# EAGLE board CT_schematic (EAGLE 7.6.0)

Size 100 x 80 mm. Coordinates in mm from the lower left corner, seen from the top.
Outline: 0,0 100,0 100,80 0,80 0,0
Copper layers (1*16): Top 0.035mm / dielectric 1.5mm / Bottom 0.035mm
Design rules "default": minimum track width 10mil, minimum drill 24mil, track to track 8mil, track to pad 8mil, pad to pad 8mil, via to via 8mil, smd to smd 8mil, copper to edge 40mil, drill to drill 8mil, minimum pad ring 10mil, minimum via ring 8mil, stop-mask expansion 4mil, vias tented up to drill 0mil, thermal gap 10mil

## Footprints (pad centres in the part's own frame; a part is rotated, then mirrored left to right if it is on the bottom)
C0402 = smd 0.5 x 0.5: 1 -0.508,0; 2 0.508,0
C0603 = smd 0.8 x 0.8: 1 -0.762,0; 2 0.762,0
C0805 = smd 1.2 x 1.3: 1 -1.016,0; 2 1.016,0
C1210 = smd 1.2 x 2.5: 1 -1.524,0; 2 1.524,0
EXV-9H = smd 3.505 x 1.676: 1 -2.857,0; 2 2.857,0
L0603 = smd 0.8 x 0.8: 1 -0.762,0; 2 0.762,0
PJ-037B_PACKAGE = drill 3.7 square: 1 12,0 | drill 3.2 square: 2 6,0
R0603 = smd 0.8 x 0.8: 1 -0.762,0; 2 0.762,0
UFBGA176 = smd 0.3 x 0.3: A1 0,0; A2 0.65,0; A3 1.3,0; A4 1.95,0; A5 2.6,0; A6 3.25,0; A7 3.9,0; A8 4.55,0; A9 5.2,0; A10 5.85,0; A11 6.5,0; A12 7.15,0; A13 7.8,0; A14 8.45,0; A15 9.1,0; B1 0,-0.65; B2 0.65,-0.65; B3 1.3,-0.65; B4 1.95,-0.65; B5 2.6,-0.65; B6 3.25,-0.65; B7 3.9,-0.65; B8 4.55,-0.65; B9 5.2,-0.65; B10 5.85,-0.65; B11 6.5,-0.65; B12 7.15,-0.65; B13 7.8,-0.65; B14 8.45,-0.65; B15 9.1,-0.65; C1 0,-1.3; C2 0.65,-1.3; C3 1.3,-1.3; C4 1.95,-1.3; C5 2.6,-1.3; C6 3.25,-1.3; C7 3.9,-1.3; C8 4.55,-1.3; C9 5.2,-1.3; C10 5.85,-1.3; C11 6.5,-1.3; C12 7.15,-1.3; C13 7.8,-1.3; C14 8.45,-1.3; C15 9.1,-1.3; D1 0,-1.95; D2 0.65,-1.95; D3 1.3,-1.95; D4 1.95,-1.95; D5 2.6,-1.95; D6 3.25,-1.95; D7 3.9,-1.95; D8 4.55,-1.95; D9 5.2,-1.95; D10 5.85,-1.95; D11 6.5,-1.95; D12 7.15,-1.95; D13 7.8,-1.95; D14 8.45,-1.95; D15 9.1,-1.95; E1 0,-2.6; E2 0.65,-2.6; E3 1.3,-2.6; E4 1.95,-2.6; E12 7.15,-2.6; E13 7.8,-2.6; E14 8.45,-2.6; E15 9.1,-2.6; F1 0,-3.25; F2 0.65,-3.25; F3 1.3,-3.25; F4 1.95,-3.25; F6 3.25,-3.25; F7 3.9,-3.25; F8 4.55,-3.25; F9 5.2,-3.25; F10 5.85,-3.25; F12 7.15,-3.25; F13 7.8,-3.25; F14 8.45,-3.25; F15 9.1,-3.25; G1 0,-3.9; G2 0.65,-3.9; G3 1.3,-3.9; G4 1.95,-3.9; G6 3.25,-3.9; G7 3.9,-3.9; G8 4.55,-3.9; G9 5.2,-3.9; G10 5.85,-3.9; G12 7.15,-3.9; G13 7.8,-3.9; G14 8.45,-3.9; G15 9.1,-3.9; H1 0,-4.55; H2 0.65,-4.55; H3 1.3,-4.55; H4 1.95,-4.55; H6 3.25,-4.55; H7 3.9,-4.55; H8 4.55,-4.55; H9 5.2,-4.55; H10 5.85,-4.55; H12 7.15,-4.55; H13 7.8,-4.55; H14 8.45,-4.55; H15 9.1,-4.55; J1 0,-5.2; J2 0.65,-5.2; J3 1.3,-5.2; J4 1.95,-5.2; J6 3.25,-5.2; J7 3.9,-5.2; J8 4.55,-5.2; J9 5.2,-5.2; J10 5.85,-5.2; J12 7.15,-5.2; J13 7.8,-5.2; J14 8.45,-5.2; J15 9.1,-5.2; K1 0,-5.85; K2 0.65,-5.85; K3 1.3,-5.85; K4 1.95,-5.85; K6 3.25,-5.85; K7 3.9,-5.85; K8 4.55,-5.85; K9 5.2,-5.85; K10 5.85,-5.85; K12 7.15,-5.85; K13 7.8,-5.85; K14 8.45,-5.85; K15 9.1,-5.85; L1 0,-6.5; L2 0.65,-6.5; L3 1.3,-6.5; L4 1.95,-6.5; L12 7.15,-6.5; L13 7.8,-6.5; L14 8.45,-6.5; L15 9.1,-6.5; M1 0,-7.15; M2 0.65,-7.15; M3 1.3,-7.15; M4 1.95,-7.15; M5 2.6,-7.15; M6 3.25,-7.15; M7 3.9,-7.15; M8 4.55,-7.15; M9 5.2,-7.15; M10 5.85,-7.15; M11 6.5,-7.15; M12 7.15,-7.15; M13 7.8,-7.15; M14 8.45,-7.15; M15 9.1,-7.15; N1 0,-7.8; N2 0.65,-7.8; N3 1.3,-7.8; N4 1.95,-7.8; N5 2.6,-7.8; N6 3.25,-7.8; N7 3.9,-7.8; N8 4.55,-7.8; N9 5.2,-7.8; N10 5.85,-7.8; N11 6.5,-7.8; N12 7.15,-7.8; N13 7.8,-7.8; N14 8.45,-7.8; N15 9.1,-7.8; P1 0,-8.45; P2 0.65,-8.45; P3 1.3,-8.45; P4 1.95,-8.45; P5 2.6,-8.45; P6 3.25,-8.45; P7 3.9,-8.45; P8 4.55,-8.45; P9 5.2,-8.45; P10 5.85,-8.45; P11 6.5,-8.45; P12 7.15,-8.45; P13 7.8,-8.45; P14 8.45,-8.45; P15 9.1,-8.45; R1 0,-9.1; R2 0.65,-9.1; R3 1.3,-9.1; R4 1.95,-9.1; R5 2.6,-9.1; R6 3.25,-9.1; R7 3.9,-9.1; R8 4.55,-9.1; R9 5.2,-9.1; R10 5.85,-9.1; R11 6.5,-9.1; R12 7.15,-9.1; R13 7.8,-9.1; R14 8.45,-9.1; R15 9.1,-9.1
SOIC-8 = smd 1.6 x 0.6: 1 -2.7,1.905 | smd 1.55 x 0.6: 2 -2.7,0.635; 3 -2.7,-0.635; 4 -2.7,-1.905; 5 2.7,-1.905; 6 2.7,-0.635; 7 2.7,0.635; 8 2.7,1.905
TQFP64_10X10MC = smd 1.473 x 0.279: 1 -5.613,3.75; 2 -5.613,3.25; 3 -5.613,2.75; 4 -5.613,2.25; 5 -5.613,1.75; 6 -5.613,1.25; 7 -5.613,0.75; 8 -5.613,0.25; 9 -5.613,-0.25; 10 -5.613,-0.75; 11 -5.613,-1.25; 12 -5.613,-1.75; 13 -5.613,-2.25; 14 -5.613,-2.75; 15 -5.613,-3.25; 16 -5.613,-3.75; 33 5.613,-3.75; 34 5.613,-3.25; 35 5.613,-2.75; 36 5.613,-2.25; 37 5.613,-1.75; 38 5.613,-1.25; 39 5.613,-0.75; 40 5.613,-0.25; 41 5.613,0.25; 42 5.613,0.75; 43 5.613,1.25; 44 5.613,1.75; 45 5.613,2.25; 46 5.613,2.75; 47 5.613,3.25; 48 5.613,3.75 | smd 0.279 x 1.473: 17 -3.75,-5.613; 18 -3.25,-5.613; 19 -2.75,-5.613; 20 -2.25,-5.613; 21 -1.75,-5.613; 22 -1.25,-5.613; 23 -0.75,-5.613; 24 -0.25,-5.613; 25 0.25,-5.613; 26 0.75,-5.613; 27 1.25,-5.613; 28 1.75,-5.613; 29 2.25,-5.613; 30 2.75,-5.613; 31 3.25,-5.613; 32 3.75,-5.613; 49 3.75,5.613; 50 3.25,5.613; 51 2.75,5.613; 52 2.25,5.613; 53 1.75,5.613; 54 1.25,5.613; 55 0.75,5.613; 56 0.25,5.613; 57 -0.25,5.613; 58 -0.75,5.613; 59 -1.25,5.613; 60 -1.75,5.613; 61 -2.25,5.613; 62 -2.75,5.613; 63 -3.25,5.613; 64 -3.75,5.613
7498011122R = smd 0.71 x 2.29: 1 -3.545,-3.18; 2 -2.525,-3.18; 3 -1.505,-3.18; 4 -0.485,-3.18; 5 0.535,-3.18; 6 1.555,-3.18; 8 3.595,-3.18; 9 5.635,-3.18; 10 6.655,-3.18; 11 -6.605,-3.18; 12 -5.585,-3.18 | smd 1.4 x 2.54: 13 -8.51,10.2; 14 8.51,10.2 | hole 1.4: -3.5,0; 3.5,0
TST-110-05-T-D-RA = drill 1 pad 1.7 square: 1 0,0 | drill 1 pad 1.7: 2 0,2.54; 3 2.54,0; 4 2.54,2.54; 5 5.08,0; 6 5.08,2.54; 7 7.62,0; 8 7.62,2.54; 9 10.16,0; 10 10.16,2.54; 11 12.7,0; 12 12.7,2.54; 13 15.24,0; 14 15.24,2.54; 15 17.78,0; 16 17.78,2.54; 17 20.32,0; 18 20.32,2.54; 19 22.86,0; 20 22.86,2.54
TDFN-8/6MM = smd 0.3 x 0.75: 1 0,0; 2 0.5,0; 3 1,0; 4 1.5,0; 5 1.5,3; 6 1,3; 7 0.5,3; 8 0,3
FCI_10118193-0001LF = smd 0.4 x 1.35: 1 -1.3,2.675; 2 -0.65,2.675; 3 0,2.675; 4 0.65,2.675; 5 1.3,2.675 | smd 1.6 x 1.4: 6 -3.2,2.45; 7 3.2,2.45 | smd 1.9 x 1.9: 8 -1.2,0; 9 1.2,0 | hole 0.5: -3.3,0; 3.3,0
SOT143B = smd 1 x 0.7: 1 -0.75,-1 | smd 0.6 x 0.7: 2 0.95,-1; 3 0.95,1; 4 -0.95,1
ASEK = smd 1.4 x 1: 1 -1.1,-0.8; 2 1.1,-0.8; 3 1.1,0.8; 4 -1.1,0.8
ASFL1 = smd 1.7 x 1.5: 1 -1.27,-1.1; 2 1.27,-1.1; 3 1.27,1.1; 4 -1.27,1.1
WSON-8 = smd 0.3 x 0.6: 1 -0.75,0; 2 0.05,0; 3 0.85,0; 4 1.65,0; 5 1.65,3.8; 6 0.85,3.8; 7 0.05,3.8; 8 -0.75,3.8 | smd 3 x 2.6: PAD 0.45,1.9
SON-6 = smd 0.55 x 0.3: 1 -0.355,0.5 | smd 0.52 x 0.3: 2 -0.37,0; 3 -0.37,-0.5; 4 0.37,-0.5; 5 0.37,0; 6 0.37,0.5
SW_4-1437565-2 = smd 1.4 x 2.1: 1 -2.23,4.55; 2 -2.23,-4.55; 3 2.23,4.55; 4 2.23,-4.55
LGM67K-G1J2-24-Z = smd 0.8 x 1.4: A -2,0; C 0,0
NC7SZ125M5X = smd 1.3 x 0.7: 1 -1.3,0.95; 2 -1.3,0; 3 -1.3,-0.95; 4 1.3,-0.95; 5 1.3,0.95

## Placement (x,y rotation side)
C1  1e-07  [C0402]  -50.8,82.55 0 top  (outside the outline)
C2  1e-06  [C0603]  -34.29,77.47 0 top  (outside the outline)
C3  1e-07  [C0402]  -54.61,82.55 0 top  (outside the outline)
C4  1e-07  [C0402]  -58.42,82.55 0 top  (outside the outline)
C5  1e-07  [C0402]  -62.23,82.55 0 top  (outside the outline)
C6  1e-07  [C0402]  -66.04,82.55 0 top  (outside the outline)
C7  1e-07  [C0402]  -69.85,82.55 0 top  (outside the outline)
C8  1e-07  [C0402]  -73.66,82.55 0 top  (outside the outline)
C9  1e-07  [C0402]  -77.47,82.55 0 top  (outside the outline)
C10  1e-07  [C0402]  -81.28,82.55 0 top  (outside the outline)
C11  1e-07  [C0402]  -15.24,87.63 0 top  (outside the outline)
C12  1e-07  [C0402]  -19.05,87.63 0 top  (outside the outline)
C13  1e-07  [C0402]  -22.86,87.63 0 top  (outside the outline)
C14  1e-07  [C0402]  -26.67,87.63 0 top  (outside the outline)
C15  1e-07  [C0402]  -30.48,87.63 0 top  (outside the outline)
C16  1e-07  [C0402]  -34.29,87.63 0 top  (outside the outline)
C17  1e-07  [C0402]  -38.1,87.63 0 top  (outside the outline)
C18  1e-07  [C0402]  -41.91,87.63 0 top  (outside the outline)
C19  1e-07  [C0402]  -45.72,87.63 0 top  (outside the outline)
C20  4.7e-06  [C0805]  -69.85,59.69 0 top  (outside the outline)
C21  1e-07  [C0402]  -49.53,87.63 0 top  (outside the outline)
C22  1e-07  [C0402]  -53.34,87.63 0 top  (outside the outline)
C23  1e-08  [C0603]  -38.1,77.47 0 top  (outside the outline)
C24  1e-06  [C0603]  -41.91,77.47 0 top  (outside the outline)
C25  2.2e-06  [C0603]  -19.05,77.47 0 top  (outside the outline)
C26  2.2e-06  [C0603]  -22.86,77.47 0 top  (outside the outline)
C27  1e-06  [C0603]  -45.72,77.47 0 top  (outside the outline)
C28  1e-08  [C0402]  -57.15,87.63 0 top  (outside the outline)
C29  1e-08  [C0402]  -60.96,87.63 0 top  (outside the outline)
C30  1.8e-08  [C0402]  -46.99,82.55 0 top  (outside the outline)
C31  2.2e-06  [C0603]  -26.67,77.47 0 top  (outside the outline)
C32  1e-07  [C0402]  -64.77,87.63 0 top  (outside the outline)
C33  1e-08  [C0402]  -68.58,87.63 0 top  (outside the outline)
C34  2.2e-06  [C0603]  -30.48,77.47 0 top  (outside the outline)
C35  1e-07  [C0402]  -72.39,87.63 0 top  (outside the outline)
C36  1e-08  [C0402]  -76.2,87.63 0 top  (outside the outline)
C37  1e-07  [C0402]  -80.01,87.63 0 top  (outside the outline)
C38  1e-07  [C0402]  -83.82,87.63 0 top  (outside the outline)
C39  1e-05  [C0805]  -74.93,59.69 0 top  (outside the outline)
C40  1e-07  [C0402]  -15.24,92.71 0 top  (outside the outline)
C41  1e-07  [C0402]  -19.05,92.71 0 top  (outside the outline)
C42  1e-07  [C0402]  -22.86,92.71 0 top  (outside the outline)
C43  1e-07  [C0402]  -26.67,92.71 0 top  (outside the outline)
C44  1e-08  [C0402]  -30.48,92.71 0 top  (outside the outline)
C45  1e-08  [C0402]  -34.29,92.71 0 top  (outside the outline)
C46  1e-08  [C0402]  -38.1,92.71 0 top  (outside the outline)
C47  1e-08  [C0402]  -41.91,92.71 0 top  (outside the outline)
C48  1e-08  [C0402]  -45.72,92.71 0 top  (outside the outline)
C49  1e-05  [C1210]  -39.37,60.96 0 top  (outside the outline)
C50  1e-05  [C1210]  -45.72,60.96 0 top  (outside the outline)
C51  1e-07  [C0402]  -49.53,92.71 0 top  (outside the outline)
C52  0.0001  [EXV-9H]  -74.93,53.34 0 top  (outside the outline)
C53  0.0001  [EXV-9H]  -17.78,60.96 0 top  (outside the outline)
C54  1e-08  [C0402]  -53.34,92.71 0 top  (outside the outline)
C55  1e-08  [C0402]  -57.15,92.71 0 top  (outside the outline)
C56  1e-08  [C0402]  -60.96,92.71 0 top  (outside the outline)
F1  600.0  [L0603]  -49.53,77.47 0 top  (outside the outline)
F2  510.0  [L0603]  -53.34,77.47 0 top  (outside the outline)
J1  PJ-037B  [PJ-037B_PACKAGE]  -62.23,7.62 0 top  (outside the outline)
R2  1000.0  [R0603]  -57.15,77.47 0 top  (outside the outline)
R7  4700.0  [R0603]  -60.96,77.47 0 top  (outside the outline)
R8  4700.0  [R0603]  -64.77,77.47 0 top  (outside the outline)
R9  2200.0  [R0603]  -68.58,77.47 0 top  (outside the outline)
R11  2200.0  [R0603]  -72.39,77.47 0 top  (outside the outline)
R13  2200.0  [R0603]  -76.2,77.47 0 top  (outside the outline)
R15  2200.0  [R0603]  -80.01,77.47 0 top  (outside the outline)
R17  10000.0  [R0603]  -25.4,67.31 0 top  (outside the outline)
R18  10000.0  [R0603]  -30.48,67.31 0 top  (outside the outline)
R19  10000.0  [R0603]  -35.56,67.31 0 top  (outside the outline)
R20  10000.0  [R0603]  -40.64,67.31 0 top  (outside the outline)
R21  10000.0  [R0603]  -45.72,67.31 0 top  (outside the outline)
R22  10000.0  [R0603]  -50.8,67.31 0 top  (outside the outline)
R23  10000.0  [R0603]  -55.88,67.31 0 top  (outside the outline)
R24  10000.0  [R0603]  -60.96,67.31 0 top  (outside the outline)
R25  10000.0  [R0603]  -66.04,67.31 0 top  (outside the outline)
R26  0.1  [R0603]  -15.24,82.55 0 top  (outside the outline)
R27  0.1  [R0603]  -19.05,82.55 0 top  (outside the outline)
R28  200.0  [R0603]  -22.86,82.55 0 top  (outside the outline)
R29  200.0  [R0603]  -26.67,82.55 0 top  (outside the outline)
R30  10000.0  [R0603]  -71.12,67.31 0 top  (outside the outline)
R31  10000.0  [R0603]  -76.2,67.31 0 top  (outside the outline)
R32  10000.0  [R0603]  -81.28,67.31 0 top  (outside the outline)
R33  1270.0  [R0603]  -30.48,82.55 0 top  (outside the outline)
R34  10000.0  [R0603]  -15.24,72.39 0 top  (outside the outline)
R35  10000.0  [R0603]  -20.32,72.39 0 top  (outside the outline)
R36  10000.0  [R0603]  -25.4,72.39 0 top  (outside the outline)
R37  10000.0  [R0603]  -30.48,72.39 0 top  (outside the outline)
R38  10000.0  [R0603]  -35.56,72.39 0 top  (outside the outline)
R39  10000.0  [R0603]  -40.64,72.39 0 top  (outside the outline)
R40  10000.0  [R0603]  -45.72,72.39 0 top  (outside the outline)
R41  10000.0  [R0603]  -50.8,72.39 0 top  (outside the outline)
R42  10000.0  [R0603]  -55.88,72.39 0 top  (outside the outline)
R43  10000.0  [R0603]  -60.96,72.39 0 top  (outside the outline)
R44  10000.0  [R0603]  -66.04,72.39 0 top  (outside the outline)
R45  10000.0  [R0603]  -71.12,72.39 0 top  (outside the outline)
R46  10000.0  [R0603]  -76.2,72.39 0 top  (outside the outline)
R47  100000.0  [R0603]  -80.01,59.69 0 top  (outside the outline)
R48  2231.0  [R0603]  -34.29,82.55 0 top  (outside the outline)
R49  1000.0  [R0603]  -38.1,82.55 0 top  (outside the outline)
R50  10000.0  [R0603]  -81.28,72.39 0 top  (outside the outline)
R51  10000.0  [R0603]  -15.24,77.47 0 top  (outside the outline)
R52  9100.0  [R0603]  -41.91,82.55 0 top  (outside the outline)
R53  680000.0  [R0603]  -15.24,67.31 0 top  (outside the outline)
R54  120000.0  [R0603]  -20.32,67.31 0 top  (outside the outline)
U1  STM32F407IGH6  [UFBGA176]  -22.86,38.1 0 top  (outside the outline)
U2  AT25256B-SSHL-T  [SOIC-8]  -49.53,33.02 0 top  (outside the outline)
U3  AT25640B-SSHL-T  [SOIC-8]  -66.04,33.02 0 top  (outside the outline)
U4  BCM5221KPT  [TQFP64_10X10MC]  -39.37,7.62 0 top  (outside the outline)
U5  7498011122R  [7498011122R]  -22.86,7.62 0 top  (outside the outline)
U6  TST-110-05-T-D-RA  [TST-110-05-T-D-RA]  -46.99,50.8 0 top  (outside the outline)
U7  24AA16-I/MC  [TDFN-8/6MM]  -34.29,33.02 0 top  (outside the outline)
U8  10118193-0001LF  [FCI_10118193-0001LF]  -72.39,43.18 0 top  (outside the outline)
U9  prtr5v0u2ax  [SOT143B]  -73.66,92.71 0 top  (outside the outline)
U10  ASEK-32.768KHz-ECST  [ASEK]  -66.04,53.34 0 top  (outside the outline)
U11  ASFL1-25MHZ-NCS  [ASFL1]  -46.99,44.45 0 top  (outside the outline)
U12  ASFL1-50MHZ-NCS  [ASFL1]  -63.5,44.45 0 top  (outside the outline)
U13  LP3878SDX-ADJ/NOPB  [WSON-8]  -30.48,43.18 0 top  (outside the outline)
U14  TPS3895ADRYR  [SON-6]  -77.47,91.44 0 top  (outside the outline)
U15  4-1437565-2  [SW_4-1437565-2]  -78.74,6.35 0 top  (outside the outline)
U16  Q65110A2395  [LGM67K-G1J2-24-Z]  -27.94,60.96 0 top  (outside the outline)
U17  nc7sz125m5x  [NC7SZ125M5X]  -50.8,59.69 0 top  (outside the outline)
U18  nc7sz125m5x  [NC7SZ125M5X]  -57.15,59.69 0 top  (outside the outline)
U19  nc7sz125m5x  [NC7SZ125M5X]  -63.5,59.69 0 top  (outside the outline)

## Library data of the parts
C1-C56 F1 F2 J1 R2 R7-R9 R11 R13 R15 R17-R54 U1-U19 = circuit_tree

## Nets
CLK_U1_E1: U1.E1 U10.3
CLK_U1_G1: U1.G1 U11.3
CLK_U4_4: U4.4 U12.3
GND: C1.2 C2.2 C3.2 C4.2 C5.2 C6.2 C7.2 C8.2 C9.2 C10.2 C11.2 C12.2 C13.2 C14.2 C15.2 C16.2 C17.2 C18.2 C19.2 C20.2 C21.2 C22.2 C23.2 C24.2 C25.2 C26.2 C27.2 C28.2 C29.2 C30.2 C31.2 C32.2 C33.2 C34.2 C35.2 C36.2 C37.2 C38.2 C39.2 C40.2 C41.2 C42.2 C43.2 C44.2 C45.2 C46.2 C47.2 C48.2 C49.2 C50.2 C51.2 C52.2 C53.2 C54.2 C55.2 C56.2 J1.2 R2.2 R18.2 R19.2 R26.2 R27.2 R30.2 R32.2 R33.2 R34.2 R36.2 R37.2 R38.2 R39.2 R40.2 R46.2 R49.2 R52.2 R54.2 U1.C15 U1.D5 U1.D7 U1.D8 U1.D9 U1.F2 U1.F6 U1.F7 U1.F8 U1.F9 U1.F10 U1.F12 U1.G2 U1.G6 U1.G7 U1.G8 U1.G9 U1.G10 U1.G12 U1.H6 U1.H7 U1.H8 U1.H9 U1.H10 U1.H12 U1.J6 U1.J7 U1.J8 U1.J9 U1.J10 U1.K6 U1.K7 U1.K8 U1.K9 U1.K10 U1.M1 U1.M8 U1.M9 U1.N1 U2.4 U3.4 U4.6 U4.7 U4.24 U4.29 U4.32 U4.40 U4.45 U4.54 U4.63 U5.10 U5.12 U6.4 U6.6 U6.8 U6.10 U6.12 U6.14 U6.16 U6.18 U6.20 U7.4 U8.5 U8.6 U8.7 U8.8 U8.9 U9.1 U10.2 U11.2 U12.2 U13.3 U13.PAD U14.2 U16.C U17.2 U17.3 U18.1 U18.3 U19.1 U19.3
NET_U1_B5: R11.1 U1.B5 U7.5
NET_U1_B6: R9.1 U1.B6 U7.6
NET_U1_C2: U15.3 U15.4
NET_U1_C3: U16.A
NET_U1_C5: C1.1 C2.1 C3.1 C23.1 C24.1 U1.C1 U1.C5 U1.C6 U1.C7 U1.C8 U1.C9 U1.F3 U1.G3 U1.G13 U1.H13 U1.J12 U1.J13 U1.K4 U1.N8 U1.N9 U1.N10 U1.R1
NET_U1_D6: R17.1 U1.D6
NET_U1_F13: C26.1 U1.F13
NET_U1_J1: R8.1 U1.J1 U19.4
NET_U1_L4: R19.1 U1.L4
NET_U1_M3: R13.1 U1.M3 U4.42
NET_U1_M6: R18.1 U1.M6
NET_U1_M10: C25.1 U1.M10
NET_U1_P1: C21.1 C22.1 F1.1 U1.P1
NET_U1_P2: R15.1 U1.P2 U4.41
NET_U2_3: R20.1 U2.3
NET_U2_7: R22.1 U2.7
NET_U3_3: R23.1 U3.3
NET_U3_7: R25.1 U3.7
NET_U4_2: C34.1 C35.1 C36.1 U4.2 U4.55
NET_U4_9: R7.1 U4.9 U18.4
NET_U4_10: R34.1 U4.10
NET_U4_11: R35.1 U4.11
NET_U4_12: R36.1 U4.12
NET_U4_13: R37.1 U4.13
NET_U4_14: R38.1 U4.14
NET_U4_16: R32.1 U4.16
NET_U4_18: R40.1 U4.18
NET_U4_20: U4.20
NET_U4_23: R33.1 U4.23
NET_U4_27: C31.1 C32.1 C33.1 U4.22 U4.27 U4.28
NET_U4_37: R39.1 U4.37
NET_U4_38: R30.1 U4.38
NET_U4_39: R31.1 U4.39
NET_U5_1: U4.31 U5.1
NET_U5_2: F2.2 U5.2
NET_U5_3: U4.30 U5.3
NET_U5_4: U4.26 U5.4
NET_U5_5: C30.1 F2.1 U5.2 U5.5
NET_U5_6: U4.25 U5.6
NET_U5_8: R27.1 U5.8
NET_U5_9: R28.1 U5.9
NET_U5_11: R29.1 U5.11
NET_U5_12: R28.2 U5.12
NET_U5_13: R26.1 U5.13 U5.14
NET_U5_35: R29.2
NET_U6_19: R46.1 U6.19
NET_U13_1: C48.1 U13.1
NET_U13_6: R48.2 R49.1 U13.6
NET_U13_8: R47.1 U13.8
NET_U14_1: R51.1 R52.1 U14.1
NET_U14_3: R53.2 R54.1 U14.3
NET_U14_4: R50.1 U14.4 U17.4 U18.2 U19.2
NET_U15_1: R2.1 U15.1 U15.2
PROC_ETH_RMII_CRS_DV: U1.R3 U4.62
PROC_ETH_RMII_RX_D0: U1.N5 U4.48
PROC_ETH_RMII_RX_D1: U1.P5 U4.47
PROC_ETH_RMII_TX_EN: U1.R13 U4.56
PROC_ETH_RMII_TXD0: U1.P12 U4.57
PROC_ETH_RMII_TXD1: U1.P13 U4.58
PROC_JTCK_SWCLK: R44.1 U1.A14 U6.9
PROC_JTDI: R42.1 U1.A13 U6.5
PROC_JTDO: U1.A10 U6.13
PROC_JTMS_SWDIO: R43.1 U1.A15 U6.7
PROC_NJTRST: R41.1 U1.A9 U6.3
PROC_OTG_FS_DM: U1.C15 U8.2 U9.3
PROC_OTG_FS_DP: U1.B15 U8.3 U9.2
PROC_OTG_FS_VBUS: C27.1 U1.E15 U8.1 U9.4
PROC_SPI1_MISO: U1.P3 U3.2
PROC_SPI1_MOSI: U1.A6 U3.5
PROC_SPI1_NSS: R24.1 U1.N4 U3.1
PROC_SPI1_SCK: U1.P4 U3.6
PROC_SPI2_MISO: U1.M4 U2.2
PROC_SPI2_MOSI: U1.M5 U2.5
PROC_SPI2_NSS: R21.1 U1.E14 U2.1
PROC_SPI2_SCK: U1.R12 U2.6
RST_OUT_U6_SRESET_B: R45.1 U6.15 U17.1
VCC_S1_14V2: C49.1 C52.1 C53.1 J1.1 R47.2 U13.4
VCC_TIER1_3V3: C4.1 C5.1 C6.1 C7.1 C8.1 C9.1 C10.1 C11.1 C12.1 C13.1 C14.1 C15.1 C16.1 C17.1 C18.1 C19.1 C20.1 C28.1 C29.1 C37.1 C38.1 C39.1 C40.1 C41.1 C42.1 C43.1 C44.1 C45.1 C46.1 C47.1 C50.1 C51.1 C54.1 C55.1 C56.1 F1.2 R7.2 R8.2 R9.2 R11.2 R13.2 R15.2 R17.2 R20.2 R21.2 R22.2 R23.2 R24.2 R25.2 R31.2 R35.2 R41.2 R42.2 R43.2 R44.2 R45.2 R48.1 R50.2 R51.2 R53.1 U1.F3 U1.G13 U2.8 U3.8 U4.1 U4.3 U4.46 U6.1 U6.2 U7.7 U7.8 U10.4 U11.4 U12.4 U13.5 U14.6 U17.5 U18.5 U19.5

## Tracks (layer width: path | path; a pad name or v marks a point on that pad's centre or on a via)
CLK_U1_E1  (1 unrouted)
CLK_U1_G1  (1 unrouted)
CLK_U4_4  (1 unrouted)
GND  (155 unrouted)
NET_U1_B5  (2 unrouted)
NET_U1_B6  (2 unrouted)
NET_U1_C2  (1 unrouted)
NET_U1_C5  (21 unrouted)
NET_U1_D6  (1 unrouted)
NET_U1_F13  (1 unrouted)
NET_U1_J1  (2 unrouted)
NET_U1_L4  (1 unrouted)
NET_U1_M3  (2 unrouted)
NET_U1_M6  (1 unrouted)
NET_U1_M10  (1 unrouted)
NET_U1_P1  (3 unrouted)
NET_U1_P2  (2 unrouted)
NET_U2_3  (1 unrouted)
NET_U2_7  (1 unrouted)
NET_U3_3  (1 unrouted)
NET_U3_7  (1 unrouted)
NET_U4_2  (4 unrouted)
NET_U4_9  (2 unrouted)
NET_U4_10  (1 unrouted)
NET_U4_11  (1 unrouted)
NET_U4_12  (1 unrouted)
NET_U4_13  (1 unrouted)
NET_U4_14  (1 unrouted)
NET_U4_16  (1 unrouted)
NET_U4_18  (1 unrouted)
NET_U4_23  (1 unrouted)
NET_U4_27  (5 unrouted)
NET_U4_37  (1 unrouted)
NET_U4_38  (1 unrouted)
NET_U4_39  (1 unrouted)
NET_U5_1  (1 unrouted)
NET_U5_2  (1 unrouted)
NET_U5_3  (1 unrouted)
NET_U5_4  (1 unrouted)
NET_U5_5  (3 unrouted)
NET_U5_6  (1 unrouted)
NET_U5_8  (1 unrouted)
NET_U5_9  (1 unrouted)
NET_U5_11  (1 unrouted)
NET_U5_12  (1 unrouted)
NET_U5_13  (2 unrouted)
NET_U6_19  (1 unrouted)
NET_U13_1  (1 unrouted)
NET_U13_6  (2 unrouted)
NET_U13_8  (1 unrouted)
NET_U14_1  (2 unrouted)
NET_U14_3  (2 unrouted)
NET_U14_4  (4 unrouted)
NET_U15_1  (2 unrouted)
PROC_ETH_RMII_CRS_DV  (1 unrouted)
PROC_ETH_RMII_RX_D0  (1 unrouted)
PROC_ETH_RMII_RX_D1  (1 unrouted)
PROC_ETH_RMII_TX_EN  (1 unrouted)
PROC_ETH_RMII_TXD0  (1 unrouted)
PROC_ETH_RMII_TXD1  (1 unrouted)
PROC_JTCK_SWCLK  (2 unrouted)
PROC_JTDI  (2 unrouted)
PROC_JTDO  (1 unrouted)
PROC_JTMS_SWDIO  (2 unrouted)
PROC_NJTRST  (2 unrouted)
PROC_OTG_FS_DM  (2 unrouted)
PROC_OTG_FS_DP  (2 unrouted)
PROC_OTG_FS_VBUS  (3 unrouted)
PROC_SPI1_MISO  (1 unrouted)
PROC_SPI1_MOSI  (1 unrouted)
PROC_SPI1_NSS  (2 unrouted)
PROC_SPI1_SCK  (1 unrouted)
PROC_SPI2_MISO  (1 unrouted)
PROC_SPI2_MOSI  (1 unrouted)
PROC_SPI2_NSS  (2 unrouted)
PROC_SPI2_SCK  (1 unrouted)
RST_OUT_U6_SRESET_B  (2 unrouted)
VCC_S1_14V2  (5 unrouted)
VCC_TIER1_3V3  (78 unrouted)